# Altium PCB MainPCB.PcbDoc
Units mil, origin at the board's own origin, x right, y up, seen from the top; angles counter-clockwise.
Board outline 1636.01 x 2040.31 mil, 2 copper layers (Top Layer, Bottom Layer); 4 components, 40 nets, 84 pads, 0 vias.
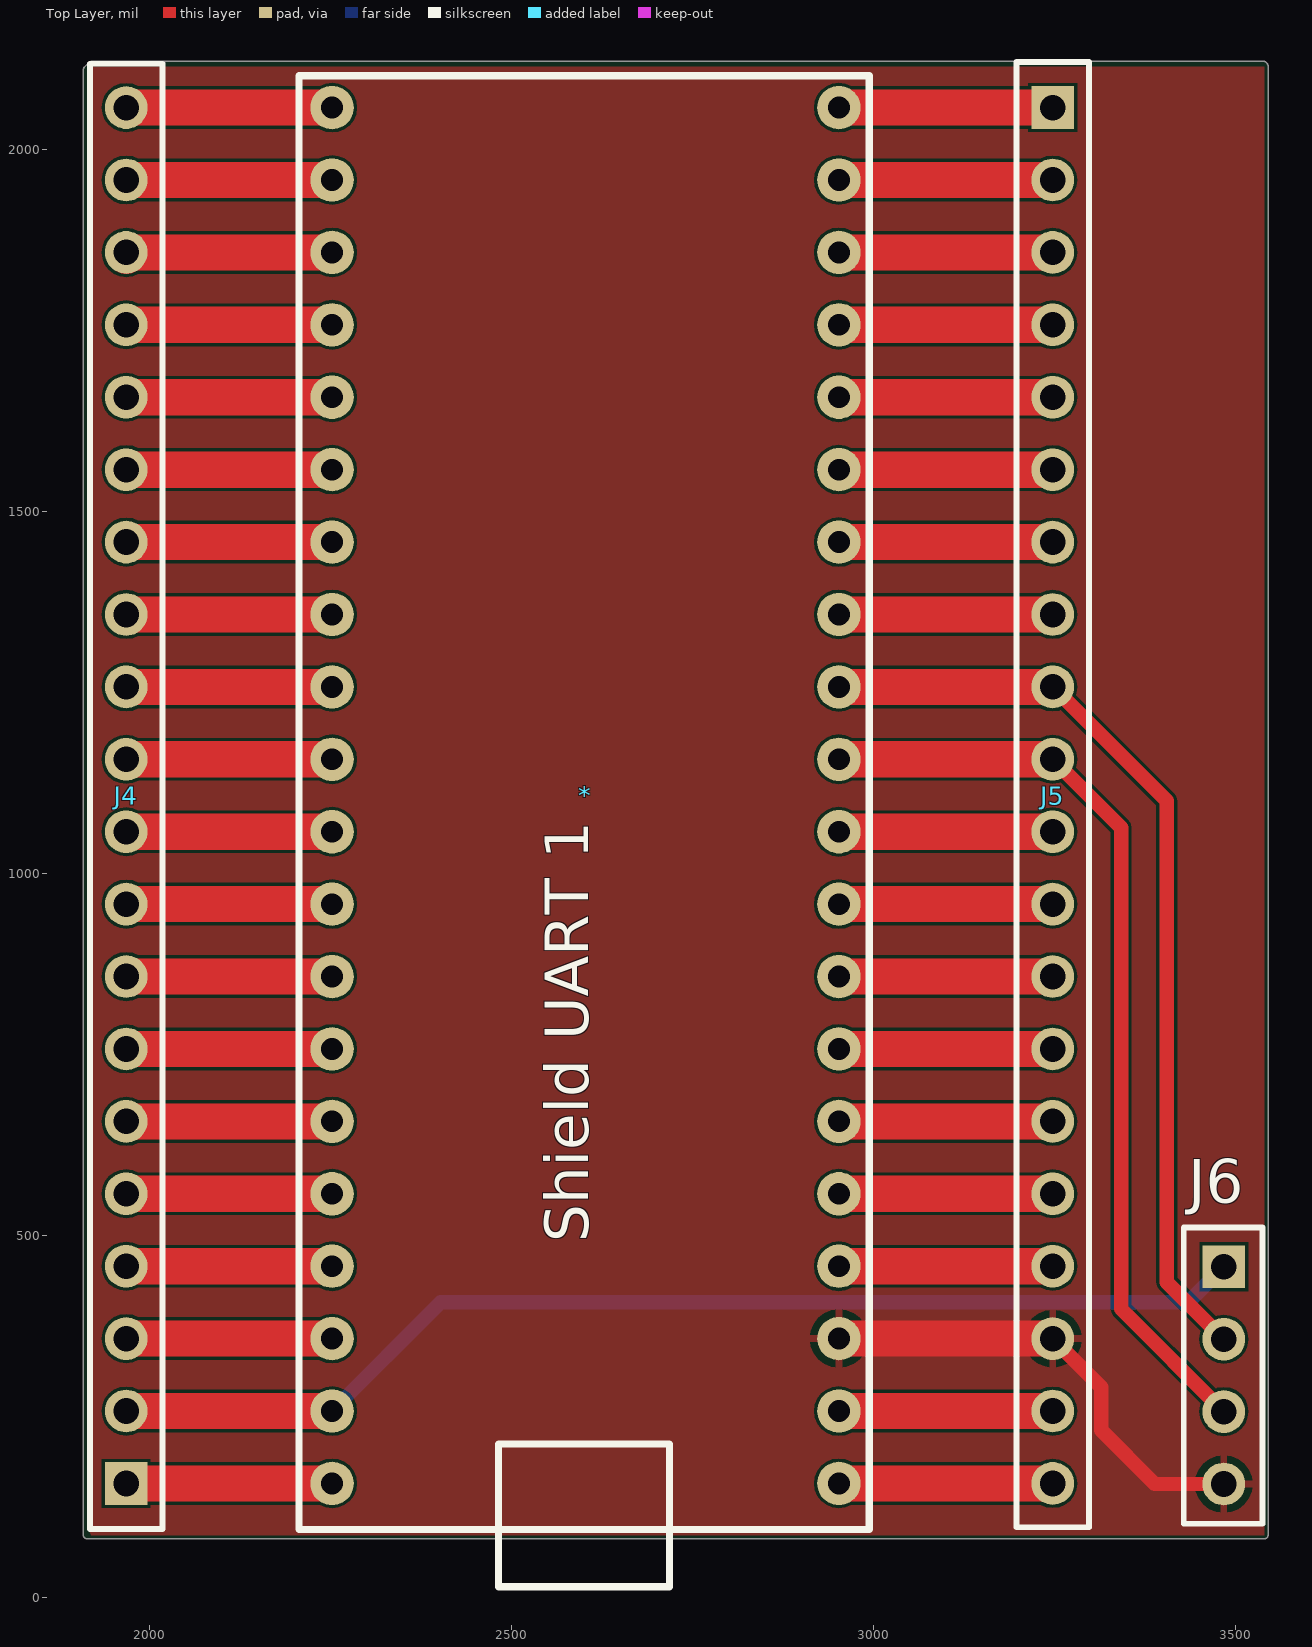
[diagram p0: Top Layer view]
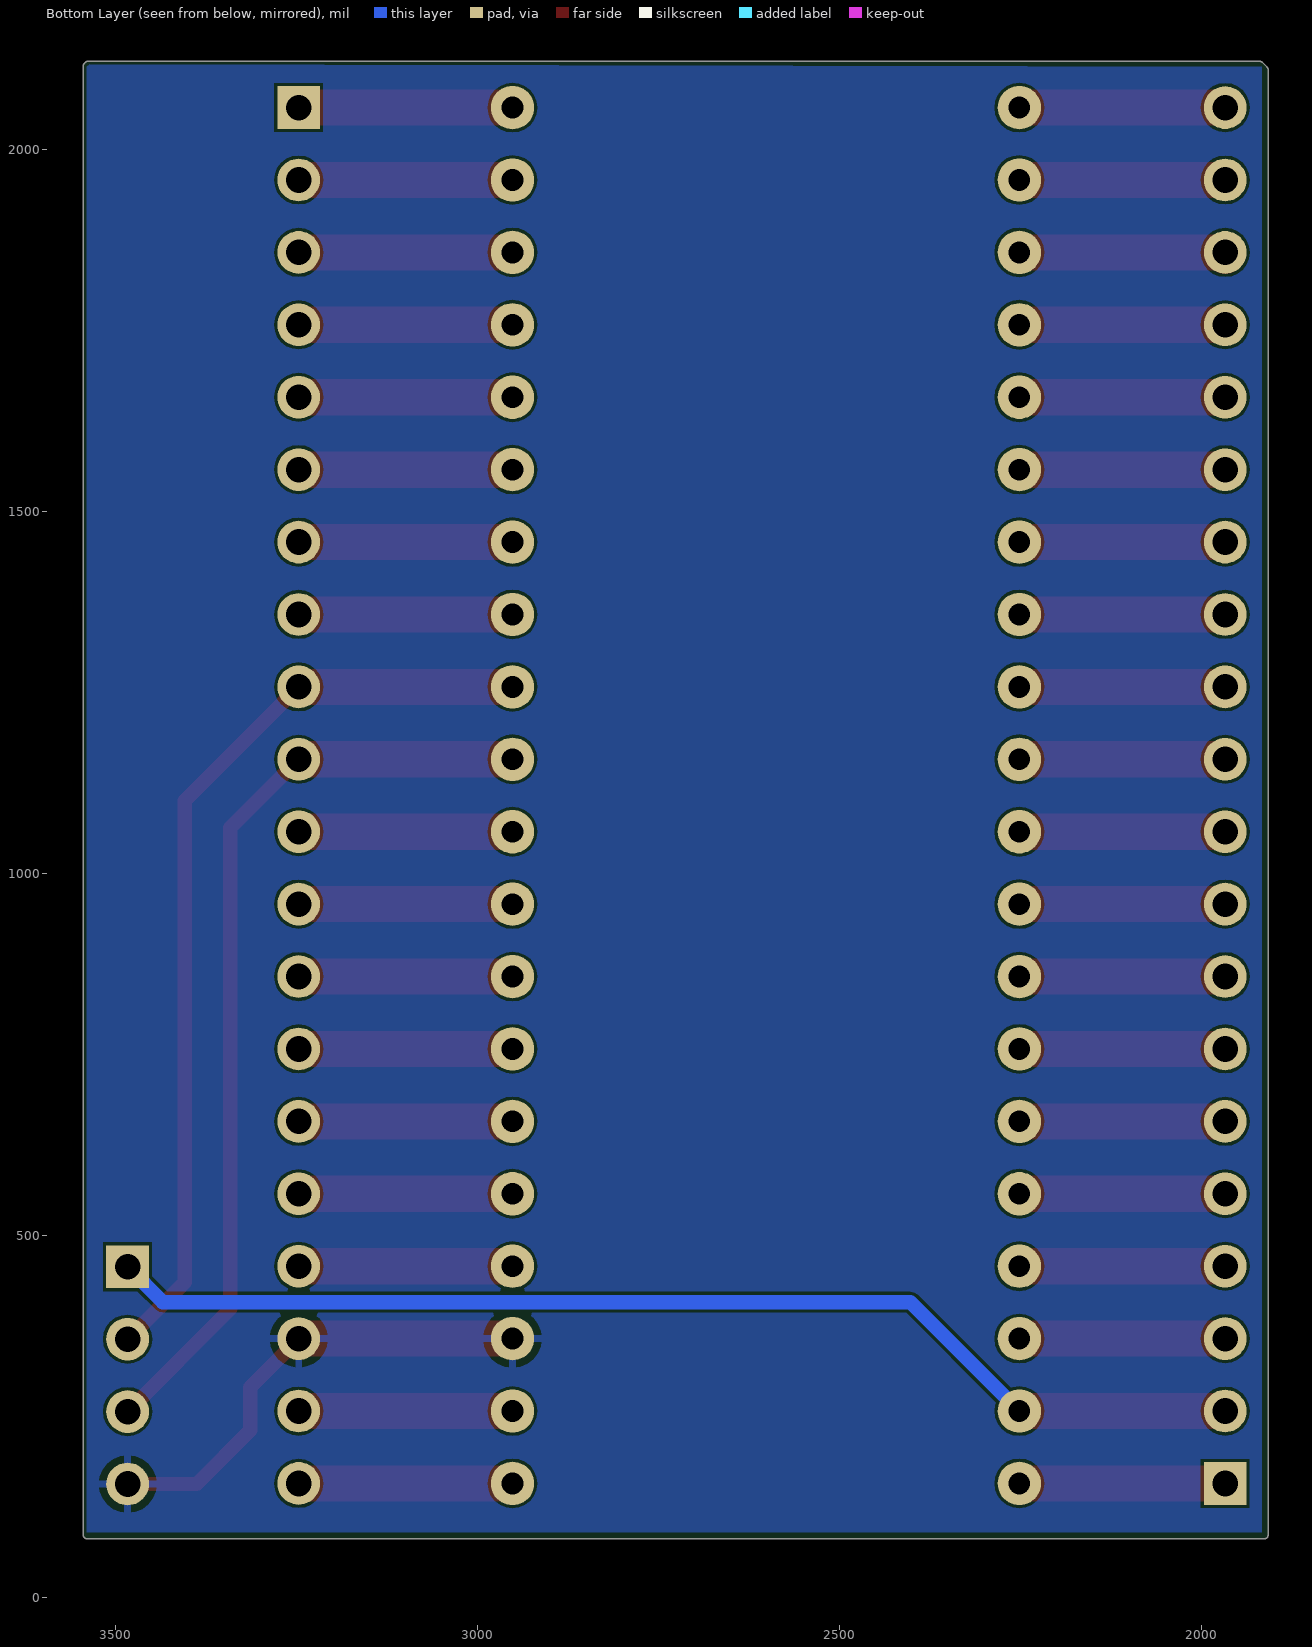
[diagram p1: Bottom Layer view, seen from below]

## Layer stack, top to bottom
Top Solder: solder mask 0.4, Solder Resist, Dk 3.5
Top Layer: signal copper 1.4
Dielectric 1: dielectric 12.6, FR-4, Dk 4.8
Bottom Layer: signal copper 1.4
Bottom Solder: solder mask 0.4, Solder Resist, Dk 3.5

## Board outline
1908.37,86.61 ccw(c1913.39,86.61) 1913.39,81.6 3539.37,81.6 ccw(c3539.37,86.61) 3544.39,86.61 3544.39,2115.67 ccw(c3539.37,2115.67) 3542.25,2119.77 ccw(c3538.15,2116.89) 3538.15,2121.9 1919.76,2121.9 ccw(c1919.76,2116.89) 1916.2,2120.42 1916.22,2120.44 1909.84,2114.06 1909.86,2114.07 ccw(c1913.39,2110.51) 1908.37,2110.51

## Design rules (kind name [scope] priority, off if disabled: settings)
Clearance [All] p1: gap=4 ignorepadtopadclearanceinfootprint=FALSE
HoleSize [All] p1: absolutevalues=TRUE maxlimit=393.7 minlimit=1 maxpercent=80.000 minpercent=20.000
MinimumSolderMaskSliver [All] p1: minsoldermaskwidth=3.94
PlaneClearance [All] p1: clearance=40
PolygonConnect [All] p1: connectstyle=Relief reliefconductorwidth=10 reliefentries=4 polygonreliefangle="90 Angle" airgapwidth=10
RoutingVias [All] p1: holewidth=15 width=30 viastyle="Through Hole" minholewidth=15 minwidth=30 maxholewidth=25 maxwidth=50
SilkToSolderMaskClearance [IsPad] p1: minsilkscreentomaskgap=3.94 clearancetoexposedcopper=TRUE
SolderMaskExpansion [All] p1: expansion=4
Width [All] p1: maxlimit=50 minlimit=10 preferedwidth=10
26 further rules are at their usual default settings.

## Classes and differential pairs
component class ShieldUART: J4 J5 J6

## Components (designator, comment, footprint, x,y, rotation, side; value= is the part's Value field where it differs from the comment)
* "Raspberry Pico" "Raspberry Pico" 1851.77,-141.93 r0 top
J4 "BARRETTE_20 CONTACTS_1 RANGEE_FEMELLE_DROITE" BARRETTE_20_F_D 1967.52,158.07 r90 top
J5 "BARRETTE_20 CONTACTS_1 RANGEE_FEMELLE_DROITE" BARRETTE_20_F_D 3247.05,2058.07 r270 top
J6 "BARRETTE_4 CONTACTS_1 RANGEE_MALE_DROITE" BARRETTE_4_M_D 3483.27,457.28 r270 top

## Footprints (in the part's own frame and the unit in brackets; to place one, negate y for a bottom-side part, rotate by r counter-clockwise, add the part's x,y. Pads: shape width x height; smd on the part's side, far side on the other; paste and mask are expansions set on the pad)
BARRETTE_4_M_D [mm] "BARRETTE 4 CONTACTS ; 1 RANGEE ; DROIT ; MALE ; ESPACEMENT BROCHES = 2.54 mm"
  rect 1.5x1.5 hole 0.9: 1(0,0)
  round 1.5 hole 0.9: 2(2.54,0) 3(5.08,0) 4(7.62,0)
  silkscreen extent -1.38,-1.4 9.01,1.36, body extent -1.28,-1.3 8.88,1.24, height 10.1
BARRETTE_20_F_D [mm] "BARRETTE 20 CONTACTS ; 1 RANGEE ; DROITE ; FEMELLE ; ESPACEMENT BROCHES = 2.54 mm"
  rect 1.5x1.5 hole 0.9: 1(0,0)
  round 1.5 hole 0.9: 2(2.54,0) 3(5.08,0) 4(7.62,0) 5(10.16,0) 6(12.7,0) 7(15.24,0) 8(17.78,0) 9(20.32,0) 10(22.86,0) 11(25.4,0) 12(27.94,0) 13(30.48,0) 14(33.02,0) 15(35.56,0) 16(38.1,0) 17(40.64,0) 18(43.18,0) 19(45.72,0) 20(48.26,0)
  silkscreen extent -1.6,-1.27 49.8,1.27, body extent -1.55,-1.2 49.75,1.21, height 8.5
"Raspberry Pico" [mil]
  round 60 hole 30: 1(1100,300) 2(1100,400) 3(1100,500) 4(1100,600) 5(1100,700) 6(1100,800) 7(1100,900) 8(1100,1000) 9(1100,1100) 10(1100,1200) 11(1100,1300) 12(1100,1400) 13(1100,1500) 14(1100,1600) 15(1100,1700) 16(1100,1800) 17(1100,1900) 18(1100,2000) 19(1100,2100) 20(1100,2200) 21(400,2200) 22(400,2100) 23(400,2000) 24(400,1900) 25(400,1800) 26(400,1700) 27(400,1600) 28(400,1500) 29(400,1400) 30(400,1300) 31(400,1200) 32(400,1100) 33(400,1000) 34(400,900) 35(400,800) 36(400,700) 37(400,600) 38(400,500) 39(400,400) 40(400,300)
  silkscreen extent 354,157 1142,2244

## Part data
J6: "BARRETTE 4 CONTACTS 1 RANGEE MALE DROITE", Type=M_D_4
J4 J5: Type=F_D_20

## Nets (pads, with @x,y where several pads share a name; then routed paths per layer and width w, separated by ;. In a path a pad name is that pad's centre, name@x,y a point inside that pad or via, vN(x,y) a via of type N, cw(c..) or ccw(c..) an arc to the next point about the centre after c; other vN are vias at no path point)
+5: *.39 J4.2 J6.1 | length 1598.3
  Top Layer w50: J4.2 *.39
  Bottom Layer w20: *.39 2402.17,408.46 3434.45,408.46 J6.1
GND: *.3 J5.18 J6.4 | length 649.7
  Top Layer w20: J5.18 3313.98,291.14 3313.98,231.3 3387.99,157.28 J6.4
  Top Layer w50: *.3 J5.18
Net*_1: *.1 J5.20 | length 295.3
  Top Layer w50: *.1 J5.20
Net*_2: *.2 J5.19 | length 295.3
  Top Layer w50: *.2 J5.19
Net*_4: *.4 J5.17 | length 295.3
  Top Layer w50: *.4 J5.17
Net*_5: *.5 J5.16 | length 295.3
  Top Layer w50: *.5 J5.16
Net*_6: *.6 J5.15 | length 295.3
  Top Layer w50: *.6 J5.15
Net*_7: *.7 J5.14 | length 295.3
  Top Layer w50: *.7 J5.14
Net*_8: *.8 J5.13 | length 295.3
  Top Layer w50: *.8 J5.13
Net*_9: *.9 J5.12 | length 295.3
  Top Layer w50: *.9 J5.12
Net*_10: *.10 J5.11 | length 295.3
  Top Layer w50: *.10 J5.11
Net*_13: *.13 J5.8 | length 295.3
  Top Layer w50: *.13 J5.8
Net*_14: *.14 J5.7 | length 295.3
  Top Layer w50: *.14 J5.7
Net*_15: *.15 J5.6 | length 295.3
  Top Layer w50: *.15 J5.6
Net*_16: *.16 J5.5 | length 295.3
  Top Layer w50: *.16 J5.5
Net*_17: *.17 J5.4 | length 295.3
  Top Layer w50: *.17 J5.4
Net*_18: *.18 J5.3 | length 295.3
  Top Layer w50: *.18 J5.3
Net*_19: *.19 J5.2 | length 295.3
  Top Layer w50: *.19 J5.2
Net*_20: *.20 J5.1 | length 295.3
  Top Layer w50: *.20 J5.1
Net*_21: *.21 J4.20 | length 284.3
  Top Layer w50: J4.20 *.21
Net*_22: *.22 J4.19 | length 284.3
  Top Layer w50: J4.19 *.22
Net*_23: *.23 J4.18 | length 290.9
  Top Layer w50: J4.18 1967.52,1853.35 1972.24,1858.07 *.23
Net*_24: *.24 J4.17 | length 284.3
  Top Layer w50: J4.17 *.24
Net*_25: *.25 J4.16 | length 284.3
  Top Layer w50: J4.16 *.25
Net*_26: *.26 J4.15 | length 284.3
  Top Layer w50: J4.15 *.26
Net*_27: *.27 J4.14 | length 284.3
  Top Layer w50: J4.14 *.27
Net*_28: *.28 J4.13 | length 284.3
  Top Layer w50: J4.13 *.28
Net*_29: *.29 J4.12 | length 284.3
  Top Layer w50: J4.12 *.29
Net*_30: *.30 J4.11 | length 284.3
  Top Layer w50: J4.11 *.30
Net*_31: *.31 J4.10 | length 284.3
  Top Layer w50: J4.10 *.31
Net*_32: *.32 J4.9 | length 284.3
  Top Layer w50: J4.9 *.32
Net*_33: *.33 J4.8 | length 284.3
  Top Layer w50: J4.8 *.33
Net*_34: *.34 J4.7 | length 284.3
  Top Layer w50: J4.7 *.34
Net*_35: *.35 J4.6 | length 284.3
  Top Layer w50: J4.6 *.35
Net*_36: *.36 J4.5 | length 284.3
  Top Layer w50: J4.5 *.36
Net*_37: *.37 J4.4 | length 284.3
  Top Layer w50: J4.4 *.37
Net*_38: *.38 J4.3 | length 284.3
  Top Layer w50: J4.3 *.38
Net*_40: *.40 J4.1 | length 284.3
  Top Layer w50: J4.1 *.40
RX_Shield: *.12 J5.9 J6.2 | length 1293.9
  Top Layer w20: J5.9 3404.53,1100.59 3404.53,436.02 J6.2
  Top Layer w50: *.12 J5.9
TX_Shield: *.11 J5.10 J6.3 | length 1293.9
  Top Layer w20: J5.10 3341.54,1063.58 3341.54,399.02 J6.3
  Top Layer w50: *.11 J5.10

## Polygon pours and split planes (outlines as drawn)
GND on Bottom Layer (solid, pour order 0): 1917.32,2114.17 1917.32,90.55 3539.37,90.55 3539.37,2118.11
GND on Top Layer (solid, pour order 2): 3539.37,86.61 1913.39,86.61 1917.32,90.55 1917.32,2114.17 3539.37,2114.17

## Silkscreen, mask and mechanical layers (free items; w line width, h text height)
Top Overlay:
  text "Shield UART 1" at 2605.32,491.14 h60 r90
Mechanical 1:
  lines w10: 3294.8,2119.25 3292.44,2116.89 ; 3292.44,2116.89 3538.15,2116.89 3539.37,2115.67 3539.37,86.61 1913.39,86.61 1913.39,2110.51 1919.76,2116.89 3292.44,2116.89